# Altium PCB niznlite.PcbDoc
Units mil, origin at the board's own origin, x right, y up, seen from the top; angles counter-clockwise.
Board outline 5100 x 2650 mil, 2 copper layers (Component Side, Solder Side); 32 components, 23 nets, 99 pads, 0 vias.
Unrouted connection lines stored in the file: 3.
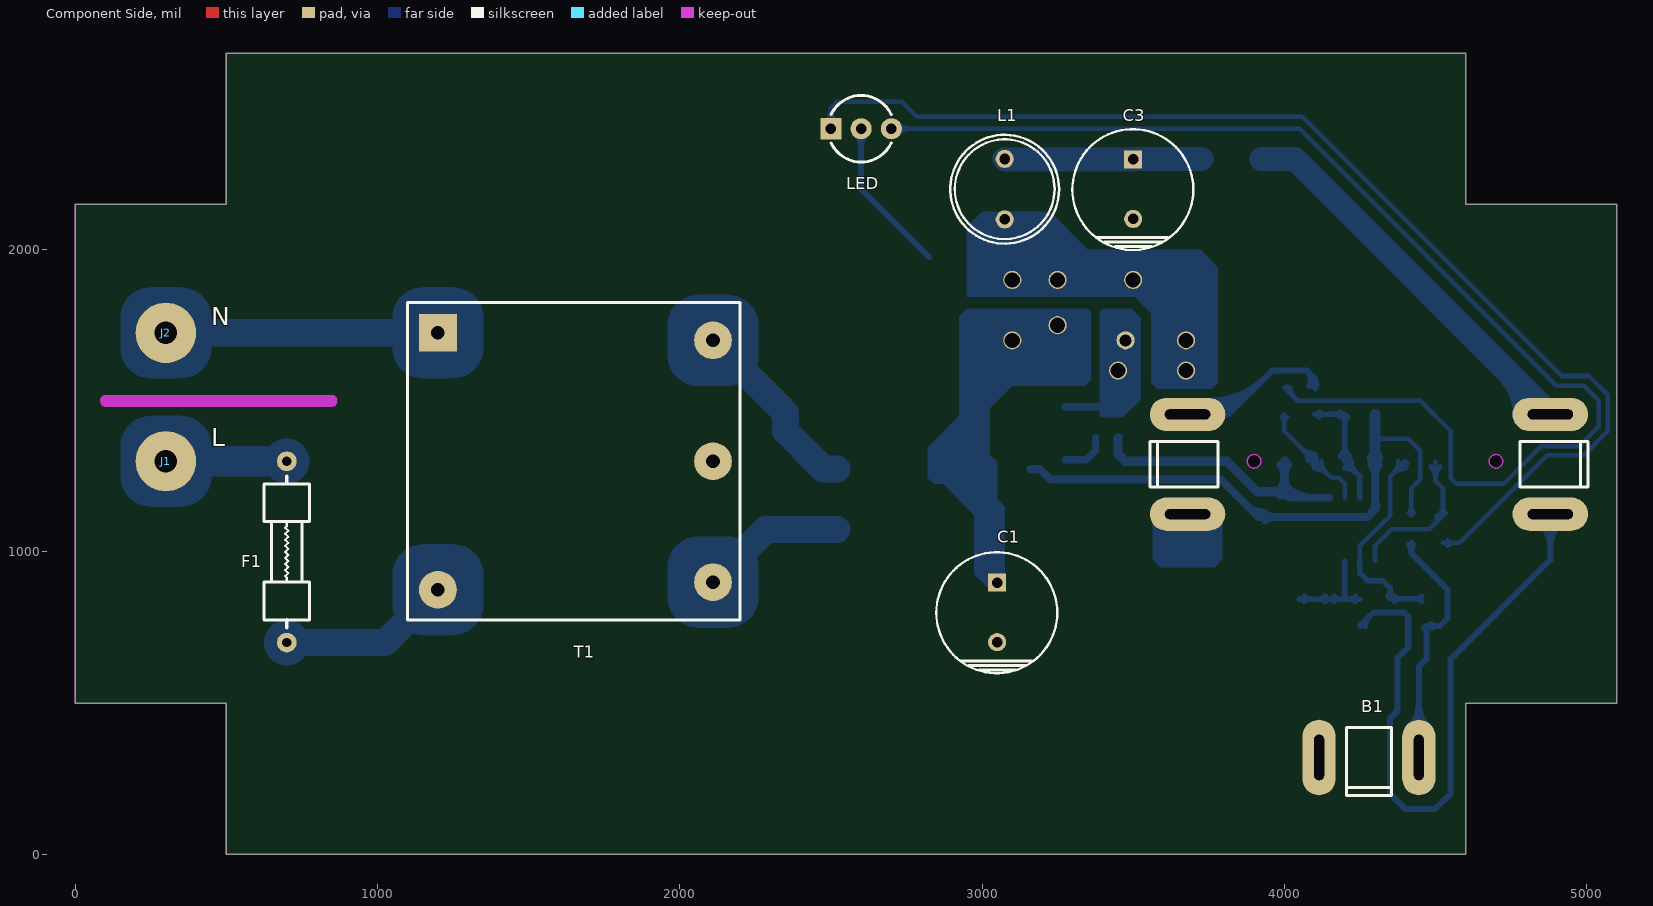
[diagram p0: Component Side view]
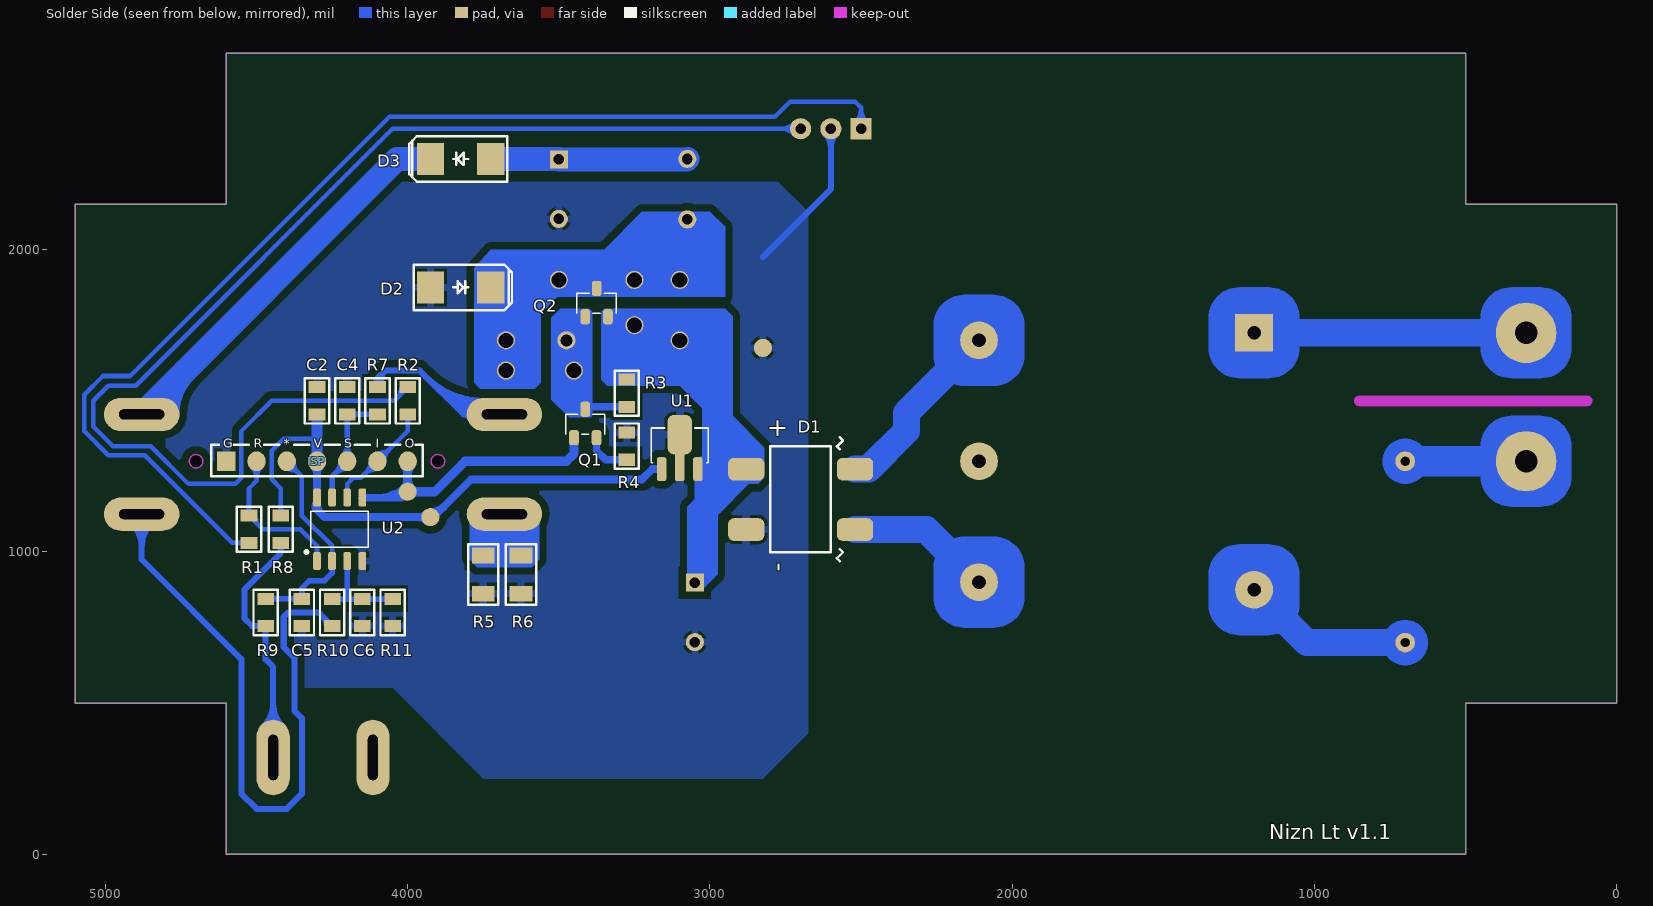
[diagram p1: Solder Side view, seen from below]
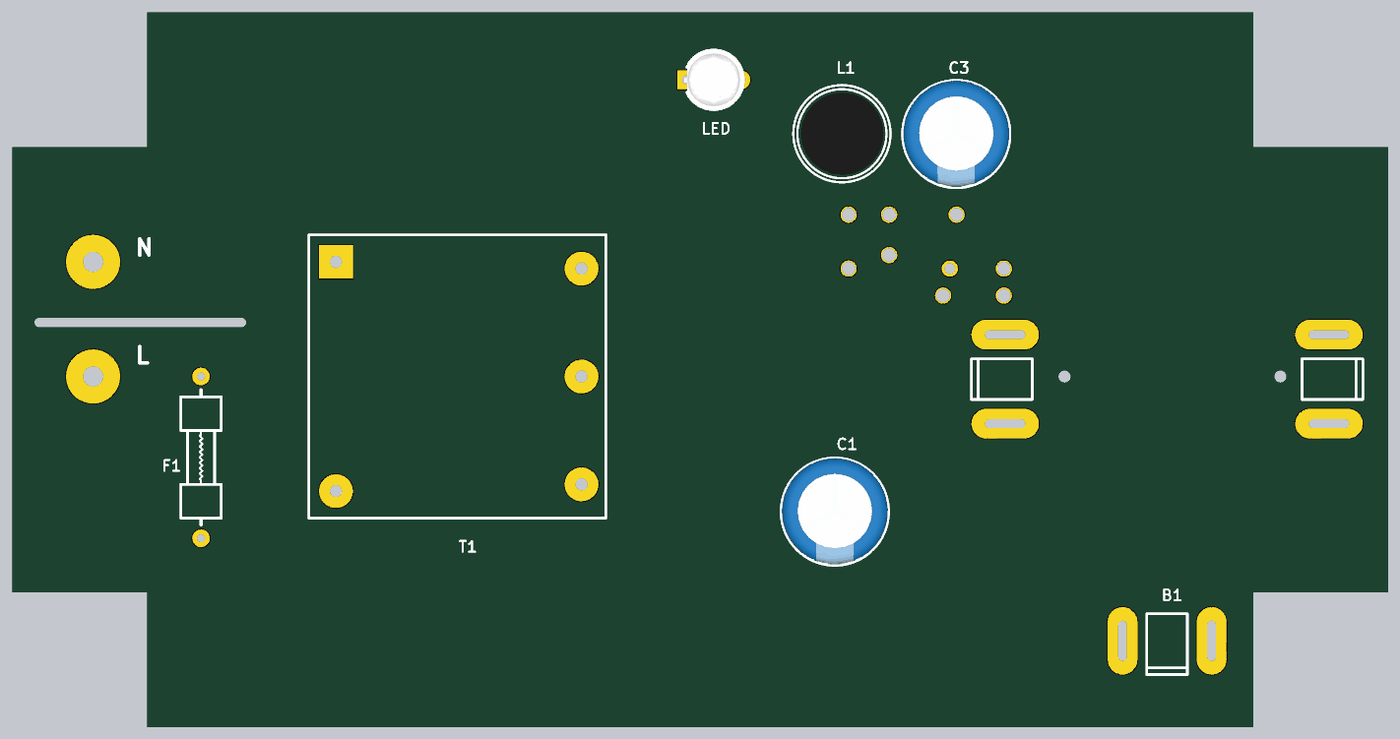
[diagram p2: 3D render of the assembled board from above, using the file's embedded part models]
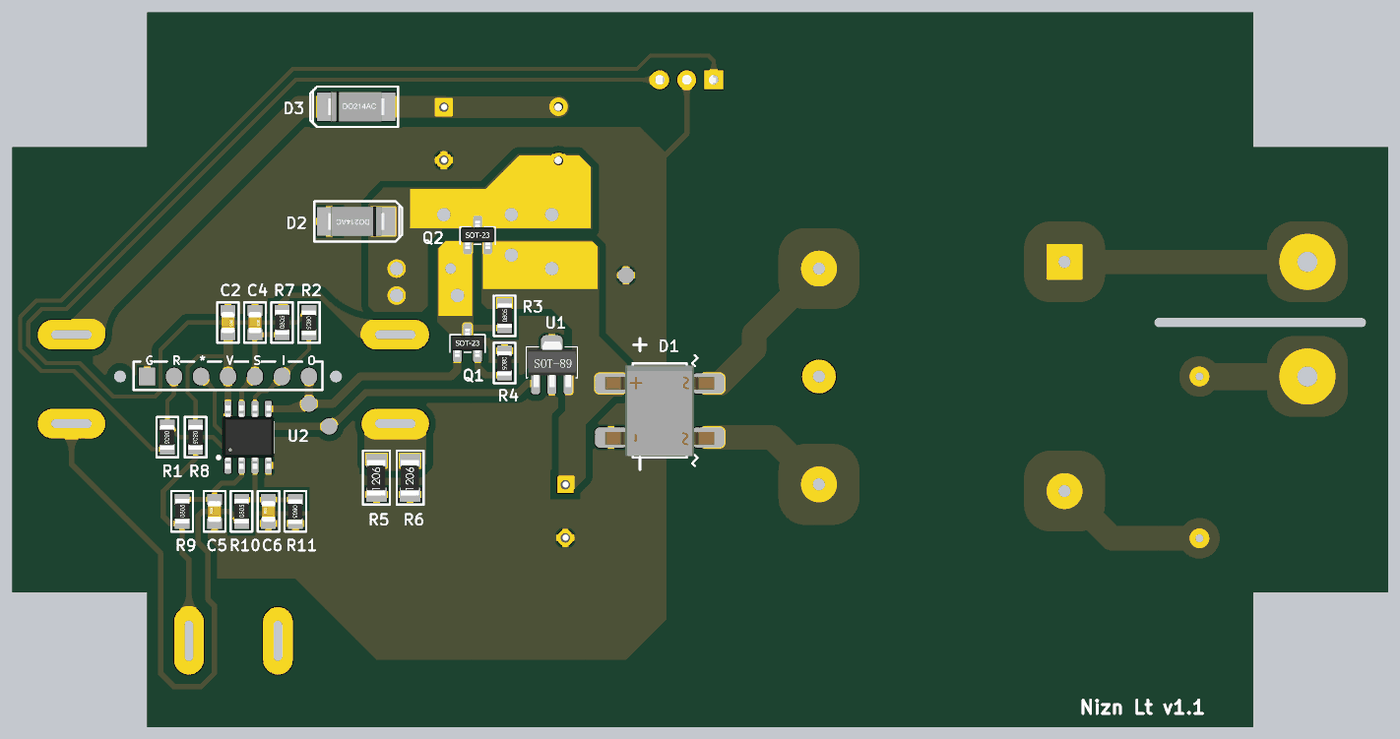
[diagram p3: 3D render of the assembled board from below, using the file's embedded part models]

## Layer stack, top to bottom
Component Side: signal copper 1.4
Dielectric: core 12.6, FR-4, Dk 4.8
Solder Side: signal copper 1.4

## Board outline
0,500 0,2150 500,2150 500,2650 4600,2650 4600,2150 5100,2150 5100,500 4600,500 4600,0 500,0 500,500
cut-out: 867.5,1500 ccw(c850,1500) 850,1517.5 100,1517.5 ccw(c100,1500) 82.5,1500 ccw(c100,1500) 100,1482.5 850,1482.5 ccw(c850,1500)
cut-out: 4700,1322.5 ccw(c4700,1300) 4677.5,1300 ccw(c4700,1300) 4700,1277.5 ccw(c4700,1300) 4722.5,1300 ccw(c4700,1300)
cut-out: 3900,1322.5 ccw(c3900,1300) 3877.5,1300 ccw(c3900,1300) 3900,1277.5 ccw(c3900,1300) 3922.5,1300 ccw(c3900,1300)

## Design rules (kind name [scope] priority, off if disabled: settings)
Clearance Clearance_1 [InNet('GND') and InPolygon] p1: gap=25
Clearance [All] p2: gap=12
HoleSize [All] p1: absolutevalues=TRUE maxlimit=200 minlimit=15 maxpercent=80.000 minpercent=20.000
PolygonConnect [All] p1: connectstyle=Relief reliefconductorwidth=25 reliefentries=4 polygonreliefangle="90 Angle" airgapwidth=10
RoomDefinition power [InComponentClass('power')] p1: confinementstyle=ConfineOut formatcopy=TRUE lockcomponents=FALSE outline 5443,0 6000,0 6000,500 5443,500
RoomDefinition charger [InComponentClass('charger')] p2: confinementstyle=ConfineOut formatcopy=TRUE lockcomponents=FALSE outline 6130,0 6700,0 6700,500 6130,500
RoutingVias [All] p1: holewidth=28 width=50 viastyle="Through Hole" minholewidth=28 minwidth=50 maxholewidth=28 maxwidth=50
SilkToSilkClearance [All] p1: silktosilkclearance=5
SilkToSolderMaskClearance [IsPad] p1: minsilkscreentomaskgap=5 clearancetoexposedcopper=TRUE
SolderMaskExpansion [All] p1: expansion=4
Width [All] p1: maxlimit=200 minlimit=1 preferedwidth=14 toplayer_maxwidth=1 toplayer_prefwidth=1 bottomlayer_minwidth=10 minimp=50.000000 maximp=50.000000 favimp=50.000000
25 further rules are at their usual default settings.

## Classes and differential pairs
component class charger: B1 C2 C3 C4 C5 C6 D2 D3 ISP L1 LED Q1 Q2 Q? R1 R2 R3 R4 R5 R6 R7 R8 R9 R10 R11 U1 U2
component class power: C1 D1 F1 J1 J2 T1

## Components (designator, comment, footprint, x,y, rotation, side; value= is the part's Value field where it differs from the comment)
B1 "BATT" BATT 4280,1290 r0 top locked
C1 "1000uF35V" CAP10X16 3050,800 r270 top
C2 "Cap" CAP0805 4300,1500 r270 bottom
C3 "330uF25V" CAP10x16 3500,2200 r270 top
C4 "Cap" CAP0805 4200,1500 r270 bottom
C5 "Cap" CAP0805 4350,800 r90 bottom
C6 "Cap" CAP0805 4150,800 r90 bottom
D1 "DF10" DF10S 2700,1174 r90 bottom
D2 "SS14" DO214A 3825,1875 r180 bottom
D3 "SS14" DO214A 3825,2300 r0 bottom
F1 "2A250V" FUSE3X10_2 700,1000 r270 top
ISP "Header 7" ISP1X7_2 4350,1300 r180 bottom
J1 "L" PAD1 300,1300 r0 top
J2 "N" PAD1 300,1725 r0 top
L1 "100uH1A" INDUCTOR 3075,2200 r90 top
LED "LEDx2" LED2 2600,2400 r0 top
Q1 "3904" SOT23_CBE 3412.5,1425 r180 bottom
Q2 "AO3407" SOT23_MOS 3375,1825 r180 bottom
R1 "Res1" RES0805 4525,1075 r270 bottom
R2 "Res1" RES0805 4000,1500 r270 bottom
R3 "Bypass" RES0805 3275,1525 r90 bottom
R4 "Bypass" RES0805 3275,1350 r270 bottom
R5 "Res1" RES1206 3750,925 r90 bottom
R6 "Res1" RES1206 3625,925 r90 bottom
R7 "Res1" RES0805 4100,1500 r90 bottom
R8 "Res1" RES0805 4420,1075 r270 bottom
R9 "Res1" RES0805 4470,800 r90 bottom
R10 "Res1" RES0805 4250,800 r90 bottom
R11 "Res1" RES0805 4050,800 r270 bottom
T1 "TRANS15V" SDB41017 1200,1300 r0 top
U1 "78L05" SOT89_VREG 3100,1275 r180 bottom
U2 "TINY13A" SO8 4225,1075 r180 bottom

## Footprints (in the part's own frame and the unit in brackets; to place one, negate y for a bottom-side part, rotate by r counter-clockwise, add the part's x,y. Pads: shape width x height; smd on the part's side, far side on the other; paste and mask are expansions set on the pad)
BATT [mil]
  oval 250x110 hole 33 slot 150 at 0 deg: 1(600,-165) 1(600,165) 2(-600,-165) 2(-600,165)
  oval 110x250 hole 33 slot 150 at 90 deg: 3(-165,-970) 3(165,-970)
  silkscreen extent -725,-1095 725,75, body extent -700,-1070 700,105, height 800
CAP10X16 [mil]
  rect 60x60 hole 35: 1(-98.43,0)
  round 60 hole 35: 2(98.43,0)
  silkscreen extent -199,-201 201,199, body extent -198,-198 196,196, height 630
CAP10x16 [mil]
  rect 60x60 hole 35: 1(-98.43,0)
  round 60 hole 35: 2(98.43,0)
  silkscreen extent -199,-201 201,199, body extent -198,-198 196,196, height 630
CAP0805 [mil]
  rect 40x55 smd: 1(-45,0) 2(45,0)
  silkscreen extent -75,-40 75,40, body extent -39,-25 39,25, height 31
DF10S [mil]
  rrect50% 75x120 smd: 1(-100,-180) 2(100,-180) 3(100,180) 4(-100,180)
  silkscreen extent -205,-140 205,100, body extent -169,-203 167,203, height 140
DO214A [mil]
  rect 90x105 smd: 1(-100,0) 2(100,0)
  silkscreen extent -155,-75 170,75, body extent -108,-55 108,55, height 90
FUSE3X10_2 [mil]
  round 65 hole 30: 1(-300,0) 2(300,0)
  silkscreen extent -250,-75 250,75, body extent -310,-70 310,70, height 145
INDUCTOR [mil]
  round 60 hole 35: 1(-100,0) 2(100,0)
  silkscreen extent -180,-180 180,180, body extent -154,-155 154,152, height 400
ISP1X7_2 [mil]
  rect 60x65 smd: 1(-250,0)
  oval 60x65 smd: 2(-150,0) 3(-50,0) 4(50,0) 5(150,0) 6(250,0) 7(350,0)
  silkscreen extent -300,-50 400,55
LED2 [mil]
  rect 70x70 hole 35: 1(-100,0)
  round 70 hole 35: 2(0,0) 3(100,0)
  silkscreen extent -100,-110 100,110, body extent -110,-116 116,116, height 464
PAD1 [mil]
  round 200 hole 75: 1(0,0)
RES0805 [mil]
  rect 40x55 smd: 1(-45,0) 2(45,0)
  silkscreen extent -75,-40 75,40, body extent -44,-27 46,26, height 30
RES1206 [mil]
  rect 52x76 smd: 1(-63,0) 2(63,0)
  silkscreen extent -100,-50 100,50, body extent -67,-33 65,35, height 33
SDB41017 [mil]
  rect 125x125 hole 45: 1(0,425)
  round 125 hole 45: 2(0,-425) 3(910,-400) 4(910,0) 5(910,400)
  silkscreen extent -100,-525 1000,525
SO8 [mil]
  rrect50% 25.59x60 smd: 1(-75,-105) 2(-25,-105) 3(25,-105) 4(75,-105) 5(75,105) 6(25,105) 7(-25,105) 8(-75,105)
  silkscreen extent -115,-80 95,60, body extent -96,-118 96,118, height 67
SOT23_CBE [mil]
  rrect50% 32x50 smd: B(-37.4,-47) C(0,47) E(37.4,-47)
  silkscreen extent -65,-35 65,30, body extent -59,-52 59,52, height 43
SOT23_MOS [mil]
  rrect50% 32x50 smd: D(0,47) G(-37.4,-47) S(37.4,-47)
  silkscreen extent -65,-35 65,30, body extent -59,-52 59,52, height 43
SOT89_VREG [mil]
  rrect50% 32x78.74 smd: 1(-60,-1) 3(60,-1)
  rrect50% 32x120 smd: 2(0,19)
  rrect50% 80x130 smd: 2(0,113)
  silkscreen extent -95,20 95,135, body extent -87,-15 90,155, height 59

## Part data
B1: "电池座"
C1 C3: library part "Cap Pol2", "电解电容"
C2 C4 C5 C6: "贴片电容"
D1: library part DF10S, "Diode Bridge"
D2 D3: library part Diode, "贴片二极管"
F1: library part "Fuse 2", "直插保险丝"
ISP: "Header, 7-Pin"
J1: library part Header1, "电源火线"
J2: library part Header1, "电源零线"
L1: library part Inductor, "工字电感"
LED: library part LED2, "˫ɫ LED"
Q1: library part NPN, "NPN 三极管"
Q2: library part PMOS, "低压 PMOS"
R1 R2 R5 R6 R7 R8 R9 R10 R11: "贴片电阻"
R3 R4: library part Res1, "Resistor"
T1: "Transformer"
U1: "三端稳压贴片"
U2: "AVR MCU"

## Free pads (board coordinates)
  round 60 hole 50: 0(3250,1900) 1(3100,1700) 1(3100,1900) 1(3250,1750) 1(3450,1600) 1(3675,1600) 1(3675,1700) 2(3500,1900)
  round 60 smd far side: 1(2825,1675) 1(3925,1115) 1(4000,1199.16)
  round 60 hole 40: 1(3475,1700)

## Nets (pads, with @x,y where several pads share a name; then routed paths per layer and width w, separated by ;. In a path a pad name is that pad's centre, name@x,y a point inside that pad or via, vN(x,y) a via of type N, cw(c..) or ccw(c..) an arc to the next point about the centre after c; other vN are vias at no path point)
5V: C2.2 ISP.4 pad.1@3925,1115 R8.1 U1.1 U2.8 | length 3590.4
  Solder Side w15: 4300,1375 4410,1375 4450,1335 4450,1240 4420,1210 R8.1 ; R8.1@4411.16,1128.84 ccw(c4389.82,1150.18) 4420,1150.18 ; R8.1@4411.16,1128.84 ccw(c4389.82,1150.18) 4420,1150.18 ; R8.1@4411.16,1128.84 ccw(c4389.82,1150.18) 4420,1150.18 ; R8.1@4411.16,1128.84 ccw(c4389.82,1150.18) 4420,1150.18 ; R8.1@4411.16,1128.84 ccw(c4389.82,1150.18) 4420,1150.18 ; 4420,1150.18 ccw(c4450.18,1150.18) R8.1@4428.84,1128.84 ; 4420,1150.18 ccw(c4450.18,1150.18) R8.1@4428.84,1128.84 ; 4420,1150.18 ccw(c4450.18,1150.18) R8.1@4428.84,1128.84 ; 4420,1150.18 ccw(c4450.18,1150.18) R8.1@4428.84,1128.84 ; 4420,1150.18 ccw(c4450.18,1150.18) R8.1@4428.84,1128.84
  Solder Side w26: U1.1 3191,1274 3225,1240 3790,1240 3915,1115 3925,1115 4275,1115 4300,1140 ; ISP.4 4300,1140 ; 3878.91,1151.09 ccw(c3925,1197.18) pad.1@3925,1132 ; 3878.91,1151.09 ccw(c3925,1197.18) pad.1@3925,1132 ; 3878.91,1151.09 ccw(c3925,1197.18) pad.1@3925,1132 ; 3878.91,1151.09 ccw(c3925,1197.18) pad.1@3925,1132 ; 3878.91,1151.09 ccw(c3925,1197.18) pad.1@3925,1132 ; pad.1@3937.02,1102.98 cw(c3966.04,1073.96) 3966.04,1115 ; pad.1@3937.02,1102.98 cw(c3966.04,1073.96) 3966.04,1115 ; pad.1@3937.02,1102.98 cw(c3966.04,1073.96) 3966.04,1115 ; pad.1@3937.02,1102.98 cw(c3966.04,1073.96) 3966.04,1115 ; pad.1@3937.02,1102.98 cw(c3966.04,1073.96) 3966.04,1115 ; pad.1@3937.02,1127.02 ccw(c3966.04,1156.04) 3966.04,1115 ; pad.1@3937.02,1127.02 ccw(c3966.04,1156.04) 3966.04,1115 ; pad.1@3937.02,1127.02 ccw(c3966.04,1156.04) 3966.04,1115 ; pad.1@3937.02,1127.02 ccw(c3966.04,1156.04) 3966.04,1115 ; pad.1@3937.02,1127.02 ccw(c3966.04,1156.04) 3966.04,1115 ; 4284.23,1124.23 ccw(c4245.67,1162.8) U2.8@4300.2,1162.8 ; 4284.23,1124.23 ccw(c4245.67,1162.8) U2.8@4300.2,1162.8 ; 4284.23,1124.23 ccw(c4245.67,1162.8) U2.8@4300.2,1162.8 ; 4284.23,1124.23 ccw(c4245.67,1162.8) U2.8@4300.2,1162.8 ; 4284.23,1124.23 ccw(c4245.67,1162.8) U2.8@4300.2,1162.8 ; ISP.4@4287.98,1285.48 cw(c4258.96,1256.46) 4300,1256.46 ; ISP.4@4287.98,1285.48 cw(c4258.96,1256.46) 4300,1256.46 ; ISP.4@4287.98,1285.48 cw(c4258.96,1256.46) 4300,1256.46 ; 4300,1140 ccw(c4288.46,1151.54) U2.8@4300.15,1162.94 ; 4300,1140 ccw(c4288.46,1151.54) U2.8@4300.15,1162.94 ; 4300,1140 ccw(c4288.46,1151.54) U2.8@4300.15,1162.94 ; 4300,1256.46 cw(c4341.04,1256.46) ISP.4@4312.02,1285.48 ; 4300,1256.46 cw(c4341.04,1256.46) ISP.4@4312.02,1285.48 ; 4300,1256.46 cw(c4341.04,1256.46) ISP.4@4312.02,1285.48 ; 4300,1258.96 cw(c4341.04,1258.96) 4312.02,1287.98 ccw(c4341.04,1258.96) 4300,1258.96 ; 4300,1258.96 ccw(c4258.96,1258.96) 4287.98,1287.98 cw(c4258.96,1258.96) 4300,1258.96
  Solder Side w35: ISP.4 C2.2 ; ISP.4@4291.16,1311.34 ccw(c4269.82,1332.68) 4300,1332.68 ; ISP.4@4291.16,1311.34 ccw(c4269.82,1332.68) 4300,1332.68 ; ISP.4@4291.16,1311.34 ccw(c4269.82,1332.68) 4300,1332.68 ; ISP.4@4300,1330.18 cw(c4269.82,1330.18) 4291.16,1308.84 ccw(c4269.82,1330.18) ISP.4@4300,1330.18 ; ISP.4@4300,1330.18 ccw(c4330.18,1330.18) 4308.84,1308.84 cw(c4330.18,1330.18) ISP.4@4300,1330.18 ; 4300,1332.68 ccw(c4330.18,1332.68) ISP.4@4308.84,1311.34 ; 4300,1332.68 ccw(c4330.18,1332.68) ISP.4@4308.84,1311.34 ; 4300,1332.68 ccw(c4330.18,1332.68) ISP.4@4308.84,1311.34
15V: C1.1 D1.3 pad.1@3100,1700 pad.1@3250,1750 Q2.S R3.2 U1.3 | length 0
GND: C1.2 C2.1 C3.2 C4.1 C5.1 C6.1 D1.4 D2.1 ISP.1 LED.2 pad.1@2825,1675 R4.1 R5.1 R6.1 R11.2 U1.2 U2.4 | length 859.5
  Solder Side w20: LED.2 2600,2200 2825,1975 ; 2600,2339.64 ccw(c2539.64,2339.64) 2582.32,2382.32 cw(c2539.64,2339.64) 2600,2339.64 ; 2600,2339.64 cw(c2660.36,2339.64) 2617.68,2382.32 ccw(c2660.36,2339.64) 2600,2339.64 ; 2600,2351.72 cw(c2648.28,2351.72) 2614.14,2385.86 ccw(c2648.28,2351.72) 2600,2351.72 ; 2600,2351.72 ccw(c2551.72,2351.72) 2585.86,2385.86 cw(c2551.72,2351.72) 2600,2351.72
MISO: ISP.6 R2.2 U2.6 | length 1772.1
  Solder Side w15: R2.2 4000,1400 ISP.6 4155,1245 4180,1245 4200,1225 U2.6 ; R2.2@3991.16,1446.16 cw(c3969.82,1424.82) 4000,1424.82 ; R2.2@3991.16,1446.16 cw(c3969.82,1424.82) 4000,1424.82 ; R2.2@3991.16,1446.16 cw(c3969.82,1424.82) 4000,1424.82 ; R2.2@3991.16,1446.16 cw(c3969.82,1424.82) 4000,1424.82 ; R2.2@3991.16,1446.16 cw(c3969.82,1424.82) 4000,1424.82 ; 4000,1424.82 cw(c4030.18,1424.82) R2.2@4008.84,1446.16 ; 4000,1424.82 cw(c4030.18,1424.82) R2.2@4008.84,1446.16 ; 4000,1424.82 cw(c4030.18,1424.82) R2.2@4008.84,1446.16 ; 4000,1424.82 cw(c4030.18,1424.82) R2.2@4008.84,1446.16 ; 4000,1424.82 cw(c4030.18,1424.82) R2.2@4008.84,1446.16 ; 4057.32,1342.68 ccw(c4100,1385.36) ISP.6@4100,1325 ; 4057.32,1342.68 ccw(c4100,1385.36) ISP.6@4100,1325 ; 4057.32,1342.68 ccw(c4100,1385.36) ISP.6@4100,1325 ; 4061.59,1338.41 cw(c4023.18,1300) ISP.6@4077.5,1300 ; 4061.59,1338.41 ccw(c4100,1376.82) ISP.6@4100,1322.5 ; 4061.59,1338.41 ccw(c4100,1376.82) ISP.6@4100,1322.5 ; 4061.59,1338.41 cw(c4023.18,1300) ISP.6@4077.5,1300 ; 4061.59,1338.41 ccw(c4100,1376.82) ISP.6@4100,1322.5 ; 4061.59,1338.41 cw(c4023.18,1300) ISP.6@4077.5,1300 ; 4063.36,1336.64 cw(c4029.22,1302.5) ISP.6@4077.5,1302.5 ; 4063.36,1336.64 cw(c4029.22,1302.5) ISP.6@4077.5,1302.5 ; 4063.36,1336.64 cw(c4029.22,1302.5) ISP.6@4077.5,1302.5 ; 4082.41,1329.71 cw(c4073.37,1295.99) ISP.6@4107.29,1304.28 ; 4082.41,1329.71 cw(c4073.37,1295.99) ISP.6@4107.29,1304.28 ; 4082.41,1329.71 cw(c4073.37,1295.99) ISP.6@4107.29,1304.28 ; ISP.6@4092.71,1295.72 ccw(c4126.63,1304.01) 4117.59,1270.29 ; ISP.6@4092.71,1295.72 ccw(c4126.63,1304.01) 4117.59,1270.29 ; ISP.6@4092.71,1295.72 ccw(c4126.63,1304.01) 4117.59,1270.29 ; ISP.6@4100,1275 cw(c4100,1214.64) 4142.68,1257.32 ; ISP.6@4100,1275 cw(c4100,1214.64) 4142.68,1257.32 ; ISP.6@4100,1275 cw(c4100,1214.64) 4142.68,1257.32 ; ISP.6@4122.5,1297.5 ccw(c4170.78,1297.5) 4136.64,1263.36 ; ISP.6@4122.5,1297.5 ccw(c4170.78,1297.5) 4136.64,1263.36 ; ISP.6@4122.5,1297.5 ccw(c4170.78,1297.5) 4136.64,1263.36 ; 4138.41,1261.59 cw(c4176.82,1300) 4122.5,1300 ccw(c4176.82,1300) 4138.41,1261.59 ; 4138.41,1261.59 ccw(c4100,1223.18) 4100,1277.5 cw(c4100,1223.18) 4138.41,1261.59
MOSI: ISP.7 pad.1@4000,1199.16 Q1.B U2.5 | length 2771.6
  Solder Side w25: pad.1@4000,1199.16 4019.16,1180 U2.5 ; pad.1@3994.7,1193.86 ccw(c4028.15,1227.32) 4028.15,1180 ; pad.1@3994.7,1193.86 ccw(c4028.15,1227.32) 4028.15,1180 ; pad.1@3994.7,1193.86 ccw(c4028.15,1227.32) 4028.15,1180 ; pad.1@3994.7,1193.86 ccw(c4028.15,1227.32) 4028.15,1180 ; pad.1@3994.7,1193.86 ccw(c4028.15,1227.32) 4028.15,1180 ; pad.1@4010.9,1185.47 cw(c4033.8,1156.71) 4052.19,1188.55 ; pad.1@4010.9,1185.47 cw(c4033.8,1156.71) 4052.19,1188.55 ; pad.1@4010.9,1185.47 cw(c4033.8,1156.71) 4052.19,1188.55 ; pad.1@4010.9,1185.47 cw(c4033.8,1156.71) 4052.19,1188.55 ; pad.1@4010.9,1185.47 cw(c4033.8,1156.71) 4052.19,1188.55 ; pad.1@4010.9,1185.47 cw(c4033.8,1156.71) 4052.19,1188.55 ; pad.1@4010.9,1185.47 cw(c4033.8,1156.71) 4052.19,1188.55 ; pad.1@4010.9,1185.47 cw(c4033.8,1156.71) 4052.19,1188.55 ; pad.1@4010.9,1185.47 cw(c4033.8,1156.71) 4052.19,1188.55 ; pad.1@4012.37,1211.54 ccw(c4088.51,1287.67) 4088.51,1180 ; pad.1@4012.37,1211.54 ccw(c4088.51,1287.67) 4088.51,1180 ; pad.1@4012.37,1211.54 ccw(c4088.51,1287.67) 4088.51,1180 ; pad.1@4012.37,1211.54 ccw(c4088.51,1287.67) 4088.51,1180 ; pad.1@4012.37,1211.54 ccw(c4088.51,1287.67) 4088.51,1180
  Solder Side w30: Q1.B 3449.9,1325.1 3475,1300 3810,1300 3910.84,1199.16 4000,1199.16 ISP.7 ; 3963.79,1199.16 cw(c3963.79,1162.95) pad.1@3989.39,1188.56 ; 3963.79,1199.16 ccw(c3963.79,1235.37) pad.1@3989.39,1209.77 ; 3963.79,1199.16 ccw(c3963.79,1235.37) pad.1@3989.39,1209.77 ; 3963.79,1199.16 cw(c3963.79,1162.95) pad.1@3989.39,1188.56 ; 3963.79,1199.16 ccw(c3963.79,1235.37) pad.1@3989.39,1209.77 ; 3963.79,1199.16 cw(c3963.79,1162.95) pad.1@3989.39,1188.56 ; 3963.79,1199.16 ccw(c3963.79,1235.37) pad.1@3989.39,1209.77 ; 3963.79,1199.16 cw(c3963.79,1162.95) pad.1@3989.39,1188.56 ; 3963.79,1199.16 ccw(c3963.79,1235.37) pad.1@3989.39,1209.77 ; 3963.79,1199.16 cw(c3963.79,1162.95) pad.1@3989.39,1188.56 ; pad.1@3989.39,1209.77 ccw(c3963.79,1235.37) 4000,1235.37 ; pad.1@3989.39,1209.77 ccw(c3963.79,1235.37) 4000,1235.37 ; pad.1@3989.39,1209.77 ccw(c3963.79,1235.37) 4000,1235.37 ; pad.1@3989.39,1209.77 ccw(c3963.79,1235.37) 4000,1235.37 ; pad.1@3989.39,1209.77 ccw(c3963.79,1235.37) 4000,1235.37 ; ISP.7@3989.39,1286.89 cw(c3963.79,1261.29) 4000,1261.29 ; ISP.7@3989.39,1286.89 cw(c3963.79,1261.29) 4000,1261.29 ; ISP.7@3989.39,1286.89 cw(c3963.79,1261.29) 4000,1261.29 ; 4000,1235.37 ccw(c4036.21,1235.37) pad.1@4010.61,1209.77 ; 4000,1235.37 ccw(c4036.21,1235.37) pad.1@4010.61,1209.77 ; 4000,1235.37 ccw(c4036.21,1235.37) pad.1@4010.61,1209.77 ; 4000,1235.37 ccw(c4036.21,1235.37) pad.1@4010.61,1209.77 ; 4000,1235.37 ccw(c4036.21,1235.37) pad.1@4010.61,1209.77 ; 4000,1261.29 cw(c4036.21,1261.29) ISP.7@4010.61,1286.89 ; 4000,1261.29 cw(c4036.21,1261.29) ISP.7@4010.61,1286.89 ; 4000,1261.29 cw(c4036.21,1261.29) ISP.7@4010.61,1286.89 ; 4000,1263.79 cw(c4036.21,1263.79) 4010.61,1289.39 ccw(c4036.21,1263.79) 4000,1263.79 ; 4000,1263.79 ccw(c3963.79,1263.79) 3989.39,1289.39 cw(c3963.79,1263.79) 4000,1263.79
NetB1_1: B1.1 D3.2 R10.1 | length 5749.3
  Solder Side w20: R10.1 4295,800 4395,800 4410,785 4410,685 4375,650 4375,475 4350,450 4350,200 4400,150 4500,150 4550,200 4550,645 4880,975 B1.1@4880,1125 ; R10.1@4267.5,755 cw(c4309.75,755) 4279.87,784.87 ; R10.1@4267.5,755 cw(c4309.75,755) 4279.87,784.87 ; R10.1@4267.5,755 cw(c4309.75,755) 4279.87,784.87 ; R10.1@4267.5,755 cw(c4309.75,755) 4279.87,784.87 ; R10.1@4267.5,755 cw(c4309.75,755) 4279.87,784.87 ; B1.1@4848.18,1093.18 cw(c4771.36,1016.36) 4880,1016.36 ; B1.1@4848.18,1093.18 cw(c4771.36,1016.36) 4880,1016.36 ; B1.1@4848.18,1093.18 cw(c4771.36,1016.36) 4880,1016.36 ; B1.1@4848.18,1093.18 cw(c4771.36,1016.36) 4880,1016.36 ; B1.1@4848.18,1093.18 cw(c4771.36,1016.36) 4880,1016.36 ; B1.1@4862.32,1107.32 cw(c4819.64,1064.64) 4880,1064.64 ; B1.1@4862.32,1107.32 cw(c4819.64,1064.64) 4880,1064.64 ; B1.1@4862.32,1107.32 cw(c4819.64,1064.64) 4880,1064.64 ; B1.1@4862.32,1107.32 cw(c4819.64,1064.64) 4880,1064.64 ; B1.1@4862.32,1107.32 cw(c4819.64,1064.64) 4880,1064.64 ; 4880,1016.36 cw(c4988.64,1016.36) B1.1@4911.82,1093.18 ; 4880,1016.36 cw(c4988.64,1016.36) B1.1@4911.82,1093.18 ; 4880,1016.36 cw(c4988.64,1016.36) B1.1@4911.82,1093.18 ; 4880,1016.36 cw(c4988.64,1016.36) B1.1@4911.82,1093.18 ; 4880,1016.36 cw(c4988.64,1016.36) B1.1@4911.82,1093.18 ; 4880,1064.64 cw(c4940.36,1064.64) B1.1@4897.68,1107.32 ; 4880,1064.64 cw(c4940.36,1064.64) B1.1@4897.68,1107.32 ; 4880,1064.64 cw(c4940.36,1064.64) B1.1@4897.68,1107.32 ; 4880,1064.64 cw(c4940.36,1064.64) B1.1@4897.68,1107.32 ; 4880,1064.64 cw(c4940.36,1064.64) B1.1@4897.68,1107.32
  Solder Side w80: D3.2 4035,2300 B1.1@4880,1455 ; 4734.9,1600.1 cw(c4589.79,1455) B1.1@4795,1455 ; 4734.9,1600.1 cw(c4589.79,1455) B1.1@4795,1455 ; 4734.9,1600.1 cw(c4589.79,1455) B1.1@4795,1455 ; 4734.9,1600.1 cw(c4589.79,1455) B1.1@4795,1455 ; 4734.9,1600.1 cw(c4589.79,1455) B1.1@4795,1455 ; B1.1@4871.46,1463.54 cw(c4862.93,1455) B1.1@4875,1455 ; B1.1@4871.46,1463.54 cw(c4862.93,1455) B1.1@4875,1455 ; B1.1@4871.46,1463.54 cw(c4862.93,1455) B1.1@4875,1455 ; B1.1@4871.46,1463.54 cw(c4862.93,1455) B1.1@4875,1455 ; B1.1@4871.46,1463.54 cw(c4862.93,1455) B1.1@4875,1455
NetB1_2: B1.2 R5.2 R6.2 R7.2 | length 9505.5
  Solder Side w20: B1.2@3680,1455 3815,1455 ; R7.2 4100,1575 4075,1600 ; B1.2@3750,1440 ccw(c3750,1560.71) 3835.36,1475.36 ; B1.2@3750,1440 ccw(c3750,1560.71) 3835.36,1475.36 ; B1.2@3750,1440 ccw(c3750,1560.71) 3835.36,1475.36 ; B1.2@3750,1440 ccw(c3750,1560.71) 3835.36,1475.36 ; B1.2@3750,1440 ccw(c3750,1560.71) 3835.36,1475.36 ; B1.2@3750,1460 ccw(c3750,1628.99) 3869.5,1509.5 ; B1.2@3750,1460 ccw(c3750,1628.99) 3869.5,1509.5 ; B1.2@3750,1460 ccw(c3750,1628.99) 3869.5,1509.5 ; B1.2@3750,1460 ccw(c3750,1628.99) 3869.5,1509.5 ; B1.2@3750,1460 ccw(c3750,1628.99) 3869.5,1509.5 ; B1.2@3750,1480 ccw(c3750,1697.28) 3903.64,1543.64 ; B1.2@3750,1480 ccw(c3750,1697.28) 3903.64,1543.64 ; B1.2@3750,1480 ccw(c3750,1697.28) 3903.64,1543.64 ; B1.2@3750,1480 ccw(c3750,1697.28) 3903.64,1543.64 ; B1.2@3750,1480 ccw(c3750,1697.28) 3903.64,1543.64 ; B1.2@3750,1500 ccw(c3750,1765.56) 3937.78,1577.78 ; B1.2@3750,1500 ccw(c3750,1765.56) 3937.78,1577.78 ; B1.2@3750,1500 ccw(c3750,1765.56) 3937.78,1577.78 ; B1.2@3750,1500 ccw(c3750,1765.56) 3937.78,1577.78 ; B1.2@3750,1500 ccw(c3750,1765.56) 3937.78,1577.78 ; B1.2@3754.4,1452.62 cw(c3832.07,1410.53) 3809.21,1495.86 ; B1.2@3754.4,1452.62 cw(c3832.07,1410.53) 3809.21,1495.86 ; B1.2@3754.4,1452.62 cw(c3832.07,1410.53) 3809.21,1495.86 ; B1.2@3754.4,1452.62 cw(c3832.07,1410.53) 3809.21,1495.86 ; B1.2@3754.4,1452.62 cw(c3832.07,1410.53) 3809.21,1495.86 ; B1.2@3754.4,1452.62 cw(c3832.07,1410.53) 3809.21,1495.86 ; B1.2@3754.4,1452.62 cw(c3832.07,1410.53) 3809.21,1495.86 ; B1.2@3754.4,1452.62 cw(c3832.07,1410.53) 3809.21,1495.86 ; B1.2@3754.4,1452.62 cw(c3832.07,1410.53) 3809.21,1495.86 ; B1.2@3754.4,1452.62 cw(c3832.07,1410.53) 3809.21,1495.86 ; B1.2@3765.33,1474.75 ccw(c3783.42,1498.06) 3804.83,1477.77 ; B1.2@3765.33,1474.75 ccw(c3783.42,1498.06) 3804.83,1477.77 ; B1.2@3765.33,1474.75 ccw(c3783.42,1498.06) 3804.83,1477.77 ; B1.2@3765.33,1474.75 ccw(c3783.42,1498.06) 3804.83,1477.77 ; B1.2@3765.33,1474.75 ccw(c3783.42,1498.06) 3804.83,1477.77 ; B1.2@3765.33,1474.75 ccw(c3783.42,1498.06) 3804.83,1477.77 ; B1.2@3765.33,1474.75 ccw(c3783.42,1498.06) 3804.83,1477.77 ; B1.2@3765.33,1474.75 ccw(c3783.42,1498.06) 3804.83,1477.77 ; B1.2@3765.33,1474.75 ccw(c3783.42,1498.06) 3804.83,1477.77 ; B1.2@3765.33,1474.75 ccw(c3783.42,1498.06) 3804.83,1477.77 ; B1.2@3771.98,1443.09 cw(c3888.39,1380.01) 3854.12,1507.9 ; B1.2@3771.98,1443.09 cw(c3888.39,1380.01) 3854.12,1507.9 ; B1.2@3771.98,1443.09 cw(c3888.39,1380.01) 3854.12,1507.9 ; B1.2@3771.98,1443.09 cw(c3888.39,1380.01) 3854.12,1507.9 ; B1.2@3771.98,1443.09 cw(c3888.39,1380.01) 3854.12,1507.9 ; B1.2@3771.98,1443.09 cw(c3888.39,1380.01) 3854.12,1507.9 ; B1.2@3771.98,1443.09 cw(c3888.39,1380.01) 3854.12,1507.9 ; B1.2@3771.98,1443.09 cw(c3888.39,1380.01) 3854.12,1507.9 ; B1.2@3771.98,1443.09 cw(c3888.39,1380.01) 3854.12,1507.9 ; B1.2@3771.98,1443.09 cw(c3888.39,1380.01) 3854.12,1507.9 ; B1.2@3772.5,1493.97 ccw(c3785.6,1516.65) 3792.38,1491.35 ; B1.2@3772.5,1493.97 ccw(c3818.58,1573.78) 3842.43,1484.77 ; B1.2@3772.5,1493.97 ccw(c3818.58,1573.78) 3842.43,1484.77 ; B1.2@3772.5,1493.97 ccw(c3785.6,1516.65) 3792.38,1491.35 ; B1.2@3772.5,1493.97 ccw(c3785.6,1516.65) 3792.38,1491.35 ; B1.2@3772.5,1493.97 ccw(c3818.58,1573.78) 3842.43,1484.77 ; B1.2@3772.5,1493.97 ccw(c3818.58,1573.78) 3842.43,1484.77 ; B1.2@3772.5,1493.97 ccw(c3785.6,1516.65) 3792.38,1491.35 ; B1.2@3772.5,1493.97 ccw(c3785.6,1516.65) 3792.38,1491.35 ; B1.2@3772.5,1493.97 ccw(c3818.58,1573.78) 3842.43,1484.77 ; B1.2@3772.5,1493.97 ccw(c3785.6,1516.65) 3792.38,1491.35 ; B1.2@3772.5,1493.97 ccw(c3818.58,1573.78) 3842.43,1484.77 ; B1.2@3772.5,1493.97 ccw(c3818.58,1573.78) 3842.43,1484.77 ; B1.2@3772.5,1493.97 ccw(c3785.6,1516.65) 3792.38,1491.35 ; B1.2@3772.5,1493.97 ccw(c3785.6,1516.65) 3792.38,1491.35 ; B1.2@3772.5,1493.97 ccw(c3818.58,1573.78) 3842.43,1484.77 ; B1.2@3772.5,1493.97 ccw(c3785.6,1516.65) 3792.38,1491.35 ; B1.2@3772.5,1493.97 ccw(c3818.58,1573.78) 3842.43,1484.77 ; B1.2@3772.5,1493.97 ccw(c3785.6,1516.65) 3792.38,1491.35 ; B1.2@3772.5,1493.97 ccw(c3818.58,1573.78) 3842.43,1484.77 ; B1.2@3773.39,1446.17 cw(c3816.97,1429.71) 3804.92,1474.71 ; B1.2@3773.39,1446.17 cw(c3816.97,1429.71) 3804.92,1474.71 ; B1.2@3773.39,1446.17 cw(c3816.97,1429.71) 3804.92,1474.71 ; B1.2@3773.39,1446.17 cw(c3816.97,1429.71) 3804.92,1474.71 ; B1.2@3773.39,1446.17 cw(c3816.97,1429.71) 3804.92,1474.71 ; B1.2@3773.39,1446.17 cw(c3816.97,1429.71) 3804.92,1474.71 ; B1.2@3773.39,1446.17 cw(c3816.97,1429.71) 3804.92,1474.71 ; B1.2@3773.39,1446.17 cw(c3816.97,1429.71) 3804.92,1474.71 ; B1.2@3773.39,1446.17 cw(c3816.97,1429.71) 3804.92,1474.71 ; B1.2@3773.39,1446.17 cw(c3816.97,1429.71) 3804.92,1474.71 ; B1.2@3777.59,1490.55 ccw(c3797.01,1515.58) 3820.01,1493.79 ; B1.2@3777.59,1490.55 ccw(c3797.01,1515.58) 3820.01,1493.79 ; B1.2@3777.59,1490.55 ccw(c3797.01,1515.58) 3820.01,1493.79 ; B1.2@3777.59,1490.55 ccw(c3797.01,1515.58) 3820.01,1493.79 ; B1.2@3777.59,1490.55 ccw(c3797.01,1515.58) 3820.01,1493.79 ; B1.2@3777.59,1490.55 ccw(c3797.01,1515.58) 3820.01,1493.79 ; B1.2@3777.59,1490.55 ccw(c3797.01,1515.58) 3820.01,1493.79 ; B1.2@3777.59,1490.55 ccw(c3797.01,1515.58) 3820.01,1493.79 ; B1.2@3777.59,1490.55 ccw(c3797.01,1515.58) 3820.01,1493.79 ; B1.2@3777.59,1490.55 ccw(c3797.01,1515.58) 3820.01,1493.79 ; B1.2@3792.1,1439.11 cw(c3861.88,1412.76) 3842.57,1484.8 ; B1.2@3792.1,1439.11 cw(c3861.88,1412.76) 3842.57,1484.8 ; B1.2@3792.1,1439.11 cw(c3861.88,1412.76) 3842.57,1484.8 ; B1.2@3792.1,1439.11 cw(c3861.88,1412.76) 3842.57,1484.8 ; B1.2@3792.1,1439.11 cw(c3861.88,1412.76) 3842.57,1484.8 ; B1.2@3792.1,1439.11 cw(c3861.88,1412.76) 3842.57,1484.8 ; B1.2@3792.1,1439.11 cw(c3861.88,1412.76) 3842.57,1484.8 ; B1.2@3792.1,1439.11 cw(c3861.88,1412.76) 3842.57,1484.8 ; B1.2@3792.1,1439.11 cw(c3861.88,1412.76) 3842.57,1484.8 ; B1.2@3792.1,1439.11 cw(c3861.88,1412.76) 3842.57,1484.8 ; B1.2@3792.12,1439.16 cw(c3815,1430.56) 3815,1455 ; B1.2@3792.12,1439.16 cw(c3815,1430.56) 3815,1455 ; B1.2@3792.12,1439.16 cw(c3815,1430.56) 3815,1455 ; B1.2@3792.12,1439.16 cw(c3815,1430.56) 3815,1455 ; B1.2@3792.12,1439.16 cw(c3815,1430.56) 3815,1455 ; B1.2@3792.12,1470.84 ccw(c3815,1479.44) 3815,1455 ; B1.2@3792.12,1470.84 ccw(c3815,1479.44) 3815,1455 ; B1.2@3792.12,1470.84 ccw(c3815,1479.44) 3815,1455 ; B1.2@3792.12,1470.84 ccw(c3815,1479.44) 3815,1455 ; B1.2@3792.12,1470.84 ccw(c3815,1479.44) 3815,1455 ; B1.2@3794.98,1456.22 cw(c3821.17,1456.92) 3802.15,1474.94 ; B1.2@3794.98,1456.22 cw(c3821.17,1456.92) 3802.15,1474.94 ; B1.2@3794.98,1456.22 cw(c3821.17,1456.92) 3802.15,1474.94 ; B1.2@3794.98,1456.22 cw(c3821.17,1456.92) 3802.15,1474.94 ; B1.2@3794.98,1456.22 cw(c3821.17,1456.92) 3802.15,1474.94 ; B1.2@3794.98,1456.22 cw(c3821.17,1456.92) 3802.15,1474.94 ; B1.2@3794.98,1456.22 cw(c3821.17,1456.92) 3802.15,1474.94 ; B1.2@3794.98,1456.22 cw(c3821.17,1456.92) 3802.15,1474.94 ; B1.2@3794.98,1456.22 cw(c3821.17,1456.92) 3802.15,1474.94 ; B1.2@3794.98,1456.22 cw(c3821.17,1456.92) 3802.15,1474.94 ; 3815,1455 3960,1600 4075,1600 ; 4075,1600 cw(c4043.72,1568.72) R7.2@4083.51,1549.37 ; 4075,1600 cw(c4043.72,1568.72) R7.2@4083.51,1549.37 ; 4075,1600 cw(c4043.72,1568.72) R7.2@4083.51,1549.37 ; 4075,1600 cw(c4043.72,1568.72) R7.2@4083.51,1549.37 ; 4075,1600 cw(c4043.72,1568.72) R7.2@4083.51,1549.37 ; R7.2@4092.93,1552.07 ccw(c4075.86,1569.14) 4100,1569.14 ; R7.2@4092.93,1552.07 ccw(c4075.86,1569.14) 4100,1569.14 ; R7.2@4092.93,1552.07 ccw(c4075.86,1569.14) 4100,1569.14 ; R7.2@4092.93,1552.07 ccw(c4075.86,1569.14) 4100,1569.14 ; R7.2@4092.93,1552.07 ccw(c4075.86,1569.14) 4100,1569.14 ; 4094.85,1580.15 cw(c4070.44,1555.73) R7.2@4101.49,1540.63 ; 4094.85,1580.15 cw(c4070.44,1555.73) R7.2@4101.49,1540.63 ; 4094.85,1580.15 cw(c4070.44,1555.73) R7.2@4101.49,1540.63 ; 4094.85,1580.15 cw(c4070.44,1555.73) R7.2@4101.49,1540.63 ; 4094.85,1580.15 cw(c4070.44,1555.73) R7.2@4101.49,1540.63 ; 4100,1569.14 ccw(c4124.14,1569.14) R7.2@4107.07,1552.07 ; 4100,1569.14 ccw(c4124.14,1569.14) R7.2@4107.07,1552.07 ; 4100,1569.14 ccw(c4124.14,1569.14) R7.2@4107.07,1552.07 ; 4100,1569.14 ccw(c4124.14,1569.14) R7.2@4107.07,1552.07 ; 4100,1569.14 ccw(c4124.14,1569.14) R7.2@4107.07,1552.07
NetB1_3: B1.3 R8.2 R9.1 | length 2494
  Solder Side w20: R8.2 4420,995 4540,875 4540,780 4515,755 R9.1 4470,645 4445,620 B1.3@4445,320 ; R8.2@4412.93,1022.93 cw(c4395.86,1005.86) 4420,1005.86 ; R8.2@4412.93,1022.93 cw(c4395.86,1005.86) 4420,1005.86 ; R8.2@4412.93,1022.93 cw(c4395.86,1005.86) 4420,1005.86 ; B1.3@4413.18,421.82 ccw(c4336.36,498.64) 4445,498.64 ; B1.3@4413.18,421.82 ccw(c4336.36,498.64) 4445,498.64 ; B1.3@4413.18,421.82 ccw(c4336.36,498.64) 4445,498.64 ; B1.3@4413.18,421.82 ccw(c4336.36,498.64) 4445,498.64 ; B1.3@4413.18,421.82 ccw(c4336.36,498.64) 4445,498.64 ; 4420,1005.86 cw(c4444.14,1005.86) R8.2@4427.07,1022.93 ; 4420,1005.86 cw(c4444.14,1005.86) R8.2@4427.07,1022.93 ; 4420,1005.86 cw(c4444.14,1005.86) R8.2@4427.07,1022.93 ; B1.3@4427.32,407.68 ccw(c4384.64,450.36) 4445,450.36 ; B1.3@4427.32,407.68 ccw(c4384.64,450.36) 4445,450.36 ; B1.3@4427.32,407.68 ccw(c4384.64,450.36) 4445,450.36 ; B1.3@4427.32,407.68 ccw(c4384.64,450.36) 4445,450.36 ; B1.3@4427.32,407.68 ccw(c4384.64,450.36) 4445,450.36 ; 4445,450.36 ccw(c4505.36,450.36) B1.3@4462.68,407.68 ; 4445,450.36 ccw(c4505.36,450.36) B1.3@4462.68,407.68 ; 4445,450.36 ccw(c4505.36,450.36) B1.3@4462.68,407.68 ; 4445,450.36 ccw(c4505.36,450.36) B1.3@4462.68,407.68 ; 4445,450.36 ccw(c4505.36,450.36) B1.3@4462.68,407.68 ; 4445,498.64 ccw(c4553.64,498.64) B1.3@4476.82,421.82 ; 4445,498.64 ccw(c4553.64,498.64) B1.3@4476.82,421.82 ; 4445,498.64 ccw(c4553.64,498.64) B1.3@4476.82,421.82 ; 4445,498.64 ccw(c4553.64,498.64) B1.3@4476.82,421.82 ; 4445,498.64 ccw(c4553.64,498.64) B1.3@4476.82,421.82 ; R9.1@4462.93,747.93 cw(c4445.86,730.86) 4470,730.86 ; R9.1@4462.93,747.93 cw(c4445.86,730.86) 4470,730.86 ; R9.1@4462.93,747.93 cw(c4445.86,730.86) 4470,730.86 ; 4470,730.86 cw(c4494.14,730.86) R9.1@4477.07,747.93 ; 4470,730.86 cw(c4494.14,730.86) R9.1@4477.07,747.93 ; 4470,730.86 cw(c4494.14,730.86) R9.1@4477.07,747.93 ; R9.1@4484.57,747.93 cw(c4501.64,730.86) 4501.64,755 ; R9.1@4484.57,747.93 cw(c4501.64,730.86) 4501.64,755 ; R9.1@4484.57,747.93 cw(c4501.64,730.86) 4501.64,755 ; R9.1@4484.57,762.07 ccw(c4501.64,779.14) 4501.64,755 ; R9.1@4484.57,762.07 ccw(c4501.64,779.14) 4501.64,755 ; R9.1@4484.57,762.07 ccw(c4501.64,779.14) 4501.64,755
NetC3_1: C3.1 D3.1 L1.2 | length 651.3
  Solder Side w80: L1.2 3076.57,2298.43 C3.1 3501.57,2300 D3.1
NetD1_1: D1.1 T1.3 | length 482.1
  Solder Side w90: T1.3 2284,1074 D1.1
NetD1_2: D1.2 T1.5 | length 621.6
  Solder Side w90: T1.5 2350,1460 2350,1400 2476,1274 D1.2
NetD2_2: D2.2 L1.1 pad.0 pad.1@3100,1900 pad.1@3675,1600 pad.1@3675,1700 pad.2 Q2.D
NetF1_1: F1.1 J1.1 | length 968.8
  Solder Side w100: J1.1 F1.1 ; J1.1@335.36,1264.64 cw(c420.71,1179.29) 420.71,1300 ; J1.1@335.36,1264.64 cw(c420.71,1179.29) 420.71,1300 ; J1.1@335.36,1264.64 cw(c420.71,1179.29) 420.71,1300 ; J1.1@335.36,1335.36 ccw(c420.71,1420.71) 420.71,1300 ; J1.1@335.36,1335.36 ccw(c420.71,1420.71) 420.71,1300 ; J1.1@335.36,1335.36 ccw(c420.71,1420.71) 420.71,1300
NetF1_2: F1.2 T1.2 | length 572.5
  Solder Side w90: F1.2 1025,700 T1.2
NetJ2_1: J2.1 T1.1 | length 1525.7
  Solder Side w90: J2.1 T1.1 ; J2.1@338.89,1686.11 cw(c432.78,1592.22) 432.78,1725 ; J2.1@338.89,1686.11 cw(c432.78,1592.22) 432.78,1725 ; J2.1@338.89,1686.11 cw(c432.78,1592.22) 432.78,1725 ; J2.1@338.89,1763.89 ccw(c432.78,1857.78) 432.78,1725 ; J2.1@338.89,1763.89 ccw(c432.78,1857.78) 432.78,1725 ; J2.1@338.89,1763.89 ccw(c432.78,1857.78) 432.78,1725
NetLED_1: LED.1 R1.2 | length 4313.9
  Solder Side w15: LED.1 2500,2470 2520,2490 2735,2490 2785,2440 4060,2440 4918,1582 5008,1582 5070,1520 5070,1400 4990,1320 4870,1320 4580,1030 R1.2 ; 2500,2466.39 ccw(c2566.39,2466.39) 2519.45,2419.45 cw(c2566.39,2466.39) 2500,2466.39 ; 2500,2466.39 cw(c2433.61,2466.39) 2480.55,2419.45 ccw(c2433.61,2466.39) 2500,2466.39 ; R1.2@4541.34,1021.16 cw(c4562.68,999.82) 4562.68,1030 ; R1.2@4541.34,1021.16 cw(c4562.68,999.82) 4562.68,1030 ; R1.2@4541.34,1021.16 cw(c4562.68,999.82) 4562.68,1030 ; R1.2@4541.34,1021.16 cw(c4562.68,999.82) 4562.68,1030 ; R1.2@4541.34,1021.16 cw(c4562.68,999.82) 4562.68,1030 ; R1.2@4541.34,1038.84 ccw(c4562.68,1060.18) 4562.68,1030 ; R1.2@4541.34,1038.84 ccw(c4562.68,1060.18) 4562.68,1030 ; R1.2@4541.34,1038.84 ccw(c4562.68,1060.18) 4562.68,1030 ; R1.2@4541.34,1038.84 ccw(c4562.68,1060.18) 4562.68,1030 ; R1.2@4541.34,1038.84 ccw(c4562.68,1060.18) 4562.68,1030
NetLED_3: LED.3 R2.1 | length 4953.8
  Solder Side w15: LED.3 4050,2400 4900,1550 4990,1550 5040,1500 5040,1415 4975,1350 4850,1350 4725,1225 4570,1225 4550,1245 4550,1400 4450,1500 4045,1500 R2.1 ; 2754.32,2400 cw(c2754.32,2454.32) 2715.91,2415.91 ccw(c2754.32,2454.32) 2754.32,2400 ; 2754.32,2400 ccw(c2754.32,2345.68) 2715.91,2384.09 cw(c2754.32,2345.68) 2754.32,2400 ; 2766.39,2400 ccw(c2766.39,2333.61) 2719.45,2380.55 cw(c2766.39,2333.61) 2766.39,2400 ; 2766.39,2400 cw(c2766.39,2466.39) 2719.45,2419.45 ccw(c2766.39,2466.39) 2766.39,2400 ; R2.1@4008.43,1547.32 cw(c3998.59,1522.79) R2.1@4024.12,1529.63 ; R2.1@4008.43,1547.32 cw(c3998.59,1522.79) R2.1@4024.12,1529.63 ; R2.1@4008.43,1547.32 cw(c3998.59,1522.79) R2.1@4024.12,1529.63 ; R2.1@4008.43,1547.32 cw(c3998.59,1522.79) R2.1@4024.12,1529.63 ; R2.1@4008.43,1547.32 cw(c3998.59,1522.79) R2.1@4024.12,1529.63 ; R2.1@4008.43,1547.32 cw(c3998.59,1522.79) R2.1@4024.12,1529.63 ; R2.1@4008.43,1547.32 cw(c3998.59,1522.79) R2.1@4024.12,1529.63 ; R2.1@4008.43,1547.32 cw(c3998.59,1522.79) R2.1@4024.12,1529.63 ; R2.1@4008.43,1547.32 cw(c3998.59,1522.79) R2.1@4024.12,1529.63 ; R2.1@4008.43,1547.32 cw(c3998.59,1522.79) R2.1@4024.12,1529.63 ; R2.1@4020,1545 ccw(c4068.28,1545) 4034.14,1510.86 ; R2.1@4020,1545 ccw(c4068.28,1545) 4034.14,1510.86 ; R2.1@4020,1545 ccw(c4068.28,1545) 4034.14,1510.86 ; R2.1@4020,1545 ccw(c4068.28,1545) 4034.14,1510.86 ; R2.1@4020,1545 ccw(c4068.28,1545) 4034.14,1510.86
NetQ1_C: pad.1@3450,1600 pad.1@3475,1700 Q1.C Q2.G R3.1 | length 141
  Solder Side w25: R3.1 3404.5,1480 Q1.C ; Q2.G Q2.G@3412.5,1777.9
NetQ1_E: Q1.E R4.2 | length 155.5
  Solder Side w24: R4.2 3345,1305 3375.1,1335.1 Q1.E
RST: ISP.2 R1.1 U2.1 | length 1605.1
  Solder Side w15: U2.1 4300,1020 4355,1075 4480,1075 R1.1 4525,1210 4500,1235 ISP.2 ; ISP.2@4484.09,1281.59 cw(c4445.68,1243.18) 4500,1243.18 ; ISP.2@4484.09,1281.59 cw(c4445.68,1243.18) 4500,1243.18 ; ISP.2@4484.09,1281.59 cw(c4445.68,1243.18) 4500,1243.18 ; 4490.86,1085.86 ccw(c4456.72,1120) R1.1@4505,1120 ; 4490.86,1085.86 ccw(c4456.72,1120) R1.1@4505,1120 ; 4490.86,1085.86 ccw(c4456.72,1120) R1.1@4505,1120 ; 4490.86,1085.86 ccw(c4456.72,1120) R1.1@4505,1120 ; 4490.86,1085.86 ccw(c4456.72,1120) R1.1@4505,1120 ; 4500,1243.18 cw(c4554.32,1243.18) ISP.2@4515.91,1281.59 ; 4500,1243.18 cw(c4554.32,1243.18) ISP.2@4515.91,1281.59 ; 4500,1243.18 cw(c4554.32,1243.18) ISP.2@4515.91,1281.59 ; 4500,1245.68 cw(c4554.32,1245.68) 4515.91,1284.09 ccw(c4554.32,1245.68) 4500,1245.68 ; 4500,1245.68 ccw(c4445.68,1245.68) 4484.09,1284.09 cw(c4445.68,1245.68) 4500,1245.68 ; R1.1@4500.88,1104.63 cw(c4526.41,1097.79) R1.1@4516.57,1122.32 ; R1.1@4500.88,1104.63 cw(c4526.41,1097.79) R1.1@4516.57,1122.32 ; R1.1@4500.88,1104.63 cw(c4526.41,1097.79) R1.1@4516.57,1122.32 ; R1.1@4500.88,1104.63 cw(c4526.41,1097.79) R1.1@4516.57,1122.32 ; R1.1@4500.88,1104.63 cw(c4526.41,1097.79) R1.1@4516.57,1122.32 ; R1.1@4500.88,1104.63 cw(c4526.41,1097.79) R1.1@4516.57,1122.32 ; R1.1@4500.88,1104.63 cw(c4526.41,1097.79) R1.1@4516.57,1122.32 ; R1.1@4500.88,1104.63 cw(c4526.41,1097.79) R1.1@4516.57,1122.32 ; R1.1@4500.88,1104.63 cw(c4526.41,1097.79) R1.1@4516.57,1122.32 ; R1.1@4500.88,1104.63 cw(c4526.41,1097.79) R1.1@4516.57,1122.32 ; R1.1@4516.16,1128.84 ccw(c4494.82,1150.18) 4525,1150.18 ; R1.1@4516.16,1128.84 ccw(c4494.82,1150.18) 4525,1150.18 ; R1.1@4516.16,1128.84 ccw(c4494.82,1150.18) 4525,1150.18 ; R1.1@4516.16,1128.84 ccw(c4494.82,1150.18) 4525,1150.18 ; R1.1@4516.16,1128.84 ccw(c4494.82,1150.18) 4525,1150.18 ; 4525,1150.18 ccw(c4555.18,1150.18) R1.1@4533.84,1128.84 ; 4525,1150.18 ccw(c4555.18,1150.18) R1.1@4533.84,1128.84 ; 4525,1150.18 ccw(c4555.18,1150.18) R1.1@4533.84,1128.84 ; 4525,1150.18 ccw(c4555.18,1150.18) R1.1@4533.84,1128.84 ; 4525,1150.18 ccw(c4555.18,1150.18) R1.1@4533.84,1128.84
SCI: C5.2 ISP.3 R9.2 U2.2 | length 1852.2
  Solder Side w15: U2.2 4250,1020 4350,1120 4350,1250 ISP.3 ; 4357.32,1257.32 cw(c4400,1214.64) ISP.3@4400,1275 ; 4357.32,1257.32 cw(c4400,1214.64) ISP.3@4400,1275 ; 4357.32,1257.32 cw(c4400,1214.64) ISP.3@4400,1275 ; 4361.59,1261.59 cw(c4400,1223.18) 4400,1277.5 ccw(c4400,1223.18) 4361.59,1261.59 ; 4361.59,1261.59 ccw(c4323.18,1300) 4377.5,1300 cw(c4323.18,1300) 4361.59,1261.59 ; 4363.36,1263.36 ccw(c4329.22,1297.5) ISP.3@4377.5,1297.5 ; 4363.36,1263.36 ccw(c4329.22,1297.5) ISP.3@4377.5,1297.5 ; 4363.36,1263.36 ccw(c4329.22,1297.5) ISP.3@4377.5,1297.5 ; 4382.41,1270.29 ccw(c4373.37,1304.01) ISP.3@4407.29,1295.72 ; 4382.41,1270.29 ccw(c4373.37,1304.01) ISP.3@4407.29,1295.72 ; 4382.41,1270.29 ccw(c4373.37,1304.01) ISP.3@4407.29,1295.72
  Solder Side w18: U2.2 4250,930 4275,905 4325,905 4350,880 C5.2 R9.2@4450,845 ; C5.2@4342.22,852.78 ccw(c4323.44,871.56) 4350,871.56 ; C5.2@4342.22,852.78 ccw(c4323.44,871.56) 4350,871.56 ; C5.2@4342.22,852.78 ccw(c4323.44,871.56) 4350,871.56 ; C5.2@4342.22,852.78 ccw(c4323.44,871.56) 4350,871.56 ; C5.2@4342.22,852.78 ccw(c4323.44,871.56) 4350,871.56 ; 4350,871.56 ccw(c4376.56,871.56) C5.2@4357.78,852.78 ; 4350,871.56 ccw(c4376.56,871.56) C5.2@4357.78,852.78 ; 4350,871.56 ccw(c4376.56,871.56) C5.2@4357.78,852.78 ; 4350,871.56 ccw(c4376.56,871.56) C5.2@4357.78,852.78 ; 4350,871.56 ccw(c4376.56,871.56) C5.2@4357.78,852.78 ; C5.2@4365.28,837.22 cw(c4384.06,818.44) 4384.06,845 ; C5.2@4365.28,837.22 cw(c4384.06,818.44) 4384.06,845 ; C5.2@4365.28,837.22 cw(c4384.06,818.44) 4384.06,845 ; C5.2@4365.28,837.22 cw(c4384.06,818.44) 4384.06,845 ; C5.2@4365.28,837.22 cw(c4384.06,818.44) 4384.06,845 ; C5.2@4365.28,852.78 ccw(c4384.06,871.56) 4384.06,845 ; C5.2@4365.28,852.78 ccw(c4384.06,871.56) 4384.06,845 ; C5.2@4365.28,852.78 ccw(c4384.06,871.56) 4384.06,845 ; C5.2@4365.28,852.78 ccw(c4384.06,871.56) 4384.06,845 ; C5.2@4365.28,852.78 ccw(c4384.06,871.56) 4384.06,845 ; 4435.94,845 cw(c4435.94,818.44) R9.2@4454.72,837.22 ; 4435.94,845 ccw(c4435.94,871.56) R9.2@4454.72,852.78 ; 4435.94,845 ccw(c4435.94,871.56) R9.2@4454.72,852.78 ; 4435.94,845 cw(c4435.94,818.44) R9.2@4454.72,837.22 ; 4435.94,845 ccw(c4435.94,871.56) R9.2@4454.72,852.78 ; 4435.94,845 cw(c4435.94,818.44) R9.2@4454.72,837.22 ; 4435.94,845 ccw(c4435.94,871.56) R9.2@4454.72,852.78 ; 4435.94,845 cw(c4435.94,818.44) R9.2@4454.72,837.22 ; 4435.94,845 ccw(c4435.94,871.56) R9.2@4454.72,852.78 ; 4435.94,845 cw(c4435.94,818.44) R9.2@4454.72,837.22
SCK: C4.2 ISP.5 R7.1 U2.7 | length 1817.8
  Solder Side w18: R7.1 C4.2 ISP.5 4250,1250 U2.7 ; R7.1@4115.28,1447.22 cw(c4134.06,1428.44) 4134.06,1455 ; R7.1@4115.28,1447.22 cw(c4134.06,1428.44) 4134.06,1455 ; R7.1@4115.28,1447.22 cw(c4134.06,1428.44) 4134.06,1455 ; R7.1@4115.28,1447.22 cw(c4134.06,1428.44) 4134.06,1455 ; R7.1@4115.28,1447.22 cw(c4134.06,1428.44) 4134.06,1455 ; R7.1@4115.28,1462.78 ccw(c4134.06,1481.56) 4134.06,1455 ; R7.1@4115.28,1462.78 ccw(c4134.06,1481.56) 4134.06,1455 ; R7.1@4115.28,1462.78 ccw(c4134.06,1481.56) 4134.06,1455 ; R7.1@4115.28,1462.78 ccw(c4134.06,1481.56) 4134.06,1455 ; R7.1@4115.28,1462.78 ccw(c4134.06,1481.56) 4134.06,1455 ; 4165.94,1455 cw(c4165.94,1428.44) C4.2@4184.72,1447.22 ; 4165.94,1455 ccw(c4165.94,1481.56) C4.2@4184.72,1462.78 ; 4165.94,1455 ccw(c4165.94,1481.56) C4.2@4184.72,1462.78 ; 4165.94,1455 cw(c4165.94,1428.44) C4.2@4184.72,1447.22 ; 4165.94,1455 ccw(c4165.94,1481.56) C4.2@4184.72,1462.78 ; 4165.94,1455 cw(c4165.94,1428.44) C4.2@4184.72,1447.22 ; 4165.94,1455 ccw(c4165.94,1481.56) C4.2@4184.72,1462.78 ; 4165.94,1455 cw(c4165.94,1428.44) C4.2@4184.72,1447.22 ; 4165.94,1455 ccw(c4165.94,1481.56) C4.2@4184.72,1462.78 ; 4165.94,1455 cw(c4165.94,1428.44) C4.2@4184.72,1447.22 ; ISP.5@4185.15,1317.35 ccw(c4149.3,1353.2) 4200,1353.2 ; ISP.5@4185.15,1317.35 ccw(c4149.3,1353.2) 4200,1353.2 ; ISP.5@4185.15,1317.35 ccw(c4149.3,1353.2) 4200,1353.2 ; C4.2@4192.22,1447.22 cw(c4173.44,1428.44) 4200,1428.44 ; C4.2@4192.22,1447.22 cw(c4173.44,1428.44) 4200,1428.44 ; C4.2@4192.22,1447.22 cw(c4173.44,1428.44) 4200,1428.44 ; C4.2@4192.22,1447.22 cw(c4173.44,1428.44) 4200,1428.44 ; C4.2@4192.22,1447.22 cw(c4173.44,1428.44) 4200,1428.44 ; ISP.5@4200,1276.5 cw(c4200,1219.77) 4240.12,1259.88 ; ISP.5@4200,1276.5 cw(c4200,1219.77) 4240.12,1259.88 ; ISP.5@4200,1276.5 cw(c4200,1219.77) 4240.12,1259.88 ; 4200,1350.7 cw(c4149.3,1350.7) 4185.15,1314.85 ccw(c4149.3,1350.7) 4200,1350.7 ; 4200,1350.7 ccw(c4250.7,1350.7) 4214.85,1314.85 cw(c4250.7,1350.7) 4200,1350.7 ; 4200,1353.2 ccw(c4250.7,1353.2) ISP.5@4214.85,1317.35 ; 4200,1353.2 ccw(c4250.7,1353.2) ISP.5@4214.85,1317.35 ; 4200,1353.2 ccw(c4250.7,1353.2) ISP.5@4214.85,1317.35 ; 4200,1428.44 cw(c4226.56,1428.44) C4.2@4207.78,1447.22 ; 4200,1428.44 cw(c4226.56,1428.44) C4.2@4207.78,1447.22 ; 4200,1428.44 cw(c4226.56,1428.44) C4.2@4207.78,1447.22 ; 4200,1428.44 cw(c4226.56,1428.44) C4.2@4207.78,1447.22 ; 4200,1428.44 cw(c4226.56,1428.44) C4.2@4207.78,1447.22 ; ISP.5@4221,1297.5 ccw(c4265.66,1297.5) 4234.08,1265.92 ; ISP.5@4221,1297.5 ccw(c4265.66,1297.5) 4234.08,1265.92 ; ISP.5@4221,1297.5 ccw(c4265.66,1297.5) 4234.08,1265.92 ; 4235.85,1264.15 cw(c4271.7,1300) 4221,1300 ccw(c4271.7,1300) 4235.85,1264.15 ; 4235.85,1264.15 ccw(c4200,1228.3) 4200,1279 cw(c4200,1228.3) 4235.85,1264.15
VBAT: C6.2 R10.2 R11.1 U2.3 | length 1161.3
  Solder Side w18: R11.1@4050,843 4100,843 R10.2@4250,843 ; 4200,843 U2.3 ; R11.1@4065.28,837.22 cw(c4079.23,823.27) 4079.23,843 ; R11.1@4065.28,837.22 cw(c4079.23,823.27) 4079.23,843 ; R11.1@4065.28,837.22 cw(c4079.23,823.27) 4079.23,843 ; R11.1@4065.28,837.22 cw(c4079.23,823.27) 4079.23,843 ; R11.1@4065.28,837.22 cw(c4079.23,823.27) 4079.23,843 ; R11.1@4065.28,852.78 ccw(c4088.88,876.38) 4088.88,843 ; R11.1@4065.28,852.78 ccw(c4088.88,876.38) 4088.88,843 ; R11.1@4065.28,852.78 ccw(c4088.88,876.38) 4088.88,843 ; R11.1@4065.28,852.78 ccw(c4088.88,876.38) 4088.88,843 ; R11.1@4065.28,852.78 ccw(c4088.88,876.38) 4088.88,843 ; 4111.12,843 ccw(c4111.12,876.38) C6.2@4134.72,852.78 ; 4111.12,843 ccw(c4111.12,876.38) C6.2@4134.72,852.78 ; 4111.12,843 ccw(c4111.12,876.38) C6.2@4134.72,852.78 ; 4111.12,843 ccw(c4111.12,876.38) C6.2@4134.72,852.78 ; 4111.12,843 ccw(c4111.12,876.38) C6.2@4134.72,852.78 ; 4120.77,843 cw(c4120.77,823.27) C6.2@4134.72,837.22 ; 4120.77,843 cw(c4120.77,823.27) C6.2@4134.72,837.22 ; 4120.77,843 cw(c4120.77,823.27) C6.2@4134.72,837.22 ; 4120.77,843 cw(c4120.77,823.27) C6.2@4134.72,837.22 ; 4120.77,843 cw(c4120.77,823.27) C6.2@4134.72,837.22 ; C6.2@4165.28,837.22 cw(c4179.23,823.27) 4179.23,843 ; C6.2@4165.28,837.22 cw(c4179.23,823.27) 4179.23,843 ; C6.2@4165.28,837.22 cw(c4179.23,823.27) 4179.23,843 ; C6.2@4165.28,837.22 cw(c4179.23,823.27) 4179.23,843 ; C6.2@4165.28,837.22 cw(c4179.23,823.27) 4179.23,843 ; C6.2@4165.28,852.78 ccw(c4188.88,876.38) 4188.88,843 ; C6.2@4165.28,852.78 ccw(c4188.88,876.38) 4188.88,843 ; C6.2@4165.28,852.78 ccw(c4188.88,876.38) 4188.88,843 ; C6.2@4165.28,852.78 ccw(c4188.88,876.38) 4188.88,843 ; C6.2@4165.28,852.78 ccw(c4188.88,876.38) 4188.88,843 ; 4211.12,843 ccw(c4211.12,876.38) R10.2@4234.72,852.78 ; 4211.12,843 ccw(c4211.12,876.38) R10.2@4234.72,852.78 ; 4211.12,843 ccw(c4211.12,876.38) R10.2@4234.72,852.78 ; 4211.12,843 ccw(c4211.12,876.38) R10.2@4234.72,852.78 ; 4211.12,843 ccw(c4211.12,876.38) R10.2@4234.72,852.78 ; 4220.77,843 cw(c4220.77,823.27) R10.2@4234.72,837.22 ; 4220.77,843 cw(c4220.77,823.27) R10.2@4234.72,837.22 ; 4220.77,843 cw(c4220.77,823.27) R10.2@4234.72,837.22 ; 4220.77,843 cw(c4220.77,823.27) R10.2@4234.72,837.22 ; 4220.77,843 cw(c4220.77,823.27) R10.2@4234.72,837.22
pads on no net: T1.4

## Polygon pours and split planes (outlines as drawn)
GND on Solder Side "PolyGnd" (solid, remove dead copper, pour order 2): 4800,1550 4125,2225 2775,2225 2675,2125 2675,400 2825,250 3750,250 4050,550 4375,550 4450,625 4450,850 4800,1200

## Keep-outs
Keep-Out Layer:
  circle w5: c4700,1300 r22.5
  circle w5: c3900,1300 r22.5
  lines w3: 0,500 0,2150 500,2150 500,2650 4600,2650 4600,2150 5100,2150 5100,500 4600,500 4600,0 500,0 500,500 0,500
  lines w35: 100,1500 850,1500

## Other copper
Solder Side:
  region net NetD1_2: 1960,1750 cw(c2060,1750) 2060,1850 2160,1850 cw(c2160,1750) 2260,1750 2260,1650 cw(c2160,1650) 2160,1550 2060,1550 cw(c2060,1650) 1960,1650
  region net NetD1_1: 1960,950 cw(c2060,950) 2060,1050 2160,1050 cw(c2160,950) 2260,950 2260,850 cw(c2160,850) 2160,750 2060,750 cw(c2060,850) 1960,850
  region net NetJ2_1: 1050,1775 cw(c1150,1775) 1150,1875 1250,1875 cw(c1250,1775) 1350,1775 1350,1675 cw(c1250,1675) 1250,1575 1150,1575 cw(c1150,1675) 1050,1675
  region net NetF1_2: 1050,925 cw(c1150,925) 1150,1025 1250,1025 cw(c1250,925) 1350,925 1350,825 cw(c1250,825) 1250,725 1150,725 cw(c1150,825) 1050,825
  region net NetJ2_1: 150,1775 cw(c250,1775) 250,1875 350,1875 cw(c350,1775) 450,1775 450,1675 cw(c350,1675) 350,1575 250,1575 cw(c250,1675) 150,1675
  region net NetF1_1: 150,1350 cw(c250,1350) 250,1450 350,1450 cw(c350,1350) 450,1350 450,1250 cw(c350,1250) 350,1150 250,1150 cw(c250,1250) 150,1250
  region net NetF1_2: 775,700 ccw(c700,700) 700,775 ccw(c700,700) 625,700 ccw(c700,700) 700,625 ccw(c700,700)
  region net NetF1_1: 775,1300 ccw(c700,1300) 700,1375 ccw(c700,1300) 625,1300 ccw(c700,1300) 700,1225 ccw(c700,1300)
  region net NetQ1_C: 3390,1795 3400,1805 3495,1805 3525,1775 3525,1503.95 3466.05,1445 3395,1445 3390,1450
  region net 15V: 2871.26,1225 2840,1225 2820,1245 2820,1345 2925,1450 2925,1780 2950,1805 3350,1805 3360,1795 3360,1570 3340,1550 3100,1550 3025,1475 3025,1320 3050,1300 3050,1175 3075,1150 3075,875 3025,875 2974.51,925.49 2974.51,1121.75
  region net NetB1_2: 3795,975 3770,950 3590,950 3565,975 3565,1150 3795,1150
  region net NetD2_2: 3000,2125 2950,2075 2950,1845 3505,1845 3560,1790 3560,1560 3580,1540 3760,1540 3780,1560 3780,1940 3725,2000 3350,2000 3225,2125

## Silkscreen, mask and mechanical layers (free items; w line width, h text height)
Bottom Overlay:
  text "Nizn Lt v1.1" at 1150,50 h50
Bottom Solder:
  region: 3395,1796.25 3400,1801.25 3493.75,1801.25 3520,1775 3520,1525 3395,1525
  region: 3625,1850 2955,1850 2955,2075 3000,2120 3220,2120 3345,1995 3625,1995
  region: 3355,1795 3350,1800 2950,1800 2930,1780 2930,1625 3355,1625

## Text inside footprints (layer, text, board x,y; h text height)
D1: Bottom Overlay "+" at 2750,1374 h60 r270; Bottom Overlay "-" at 2750,934 h60 r270
ISP: Bottom Overlay "*" at 4410,1345 h30; Bottom Overlay "O" at 4010,1345 h30; Bottom Overlay "I" at 4105,1345 h30; Bottom Overlay "S" at 4210,1345 h30; Bottom Overlay "V" at 4310,1345 h30; Bottom Overlay "R" at 4510,1345 h30; Bottom Overlay "G" at 4610,1345 h30